# Altium PCB front_controller.PcbDoc
Units mil, origin at the board's own origin, x right, y up, seen from the top; angles counter-clockwise.
Board outline 2850 x 1885 mil, 2 copper layers (Top Layer, Bottom Layer); 25 components, 23 nets, 104 pads, 2 vias.
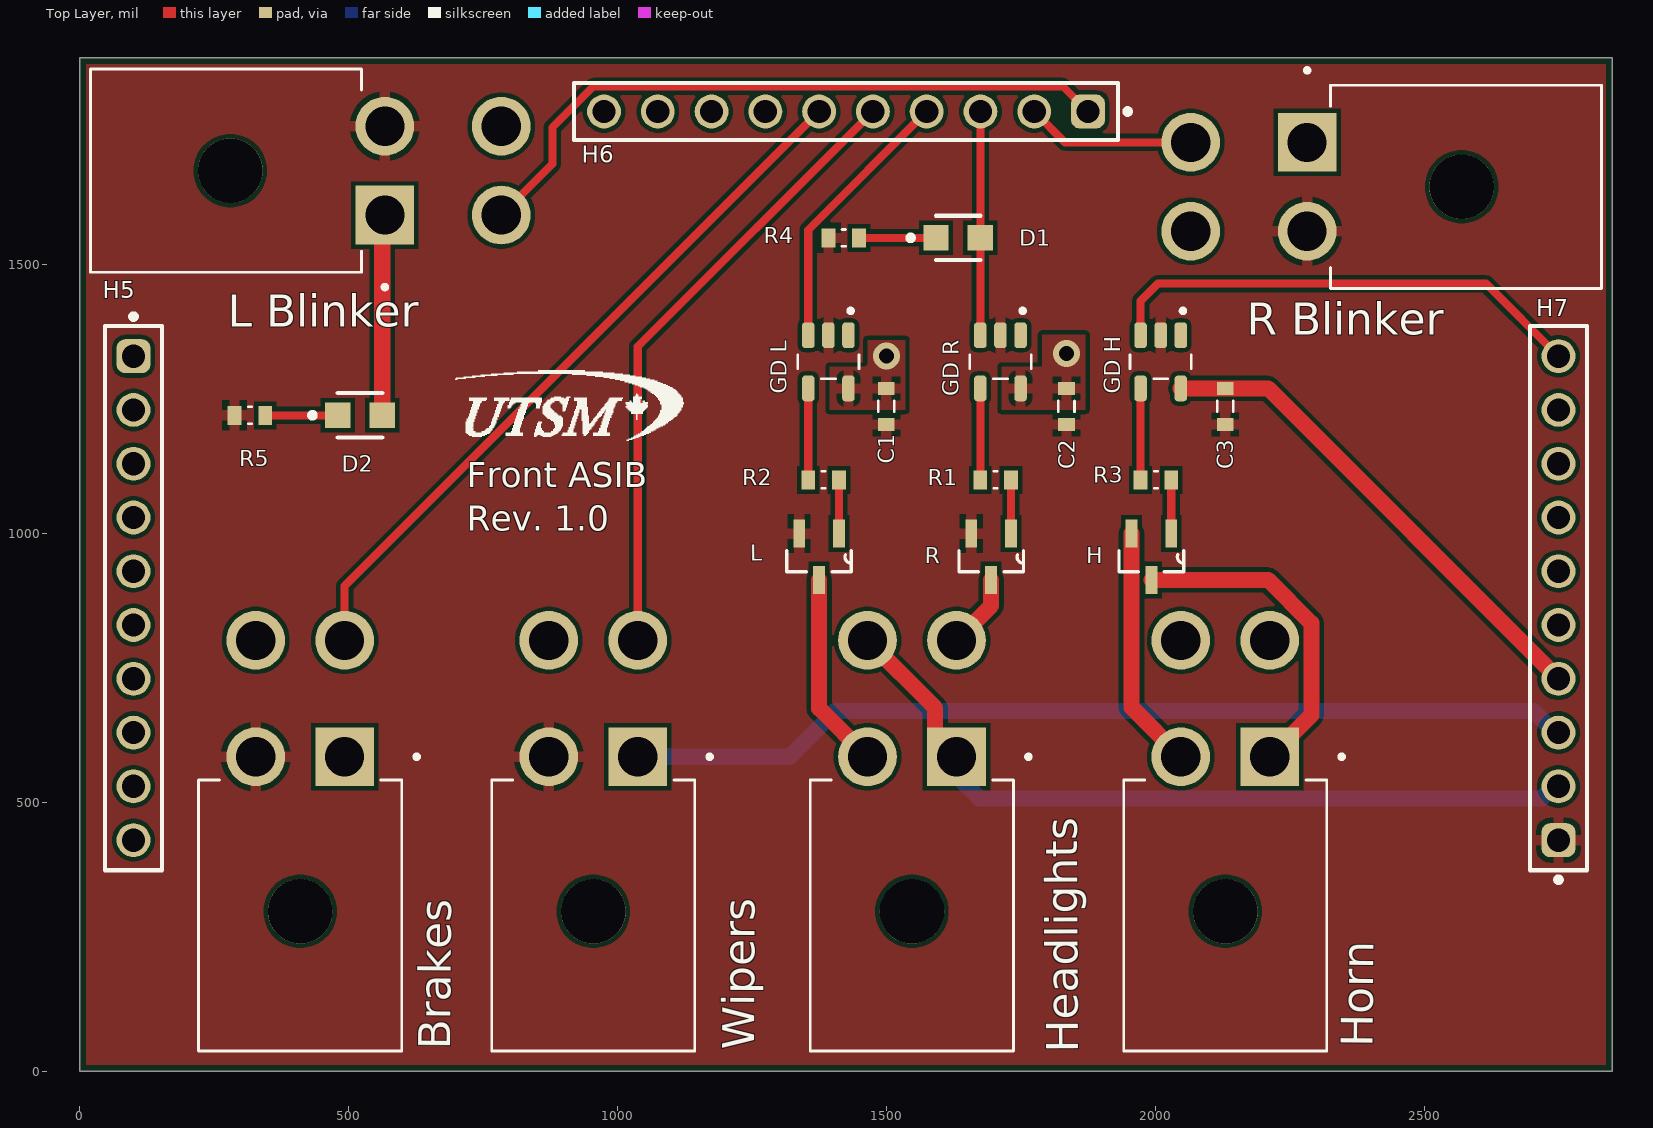
[diagram p0: Top Layer view]
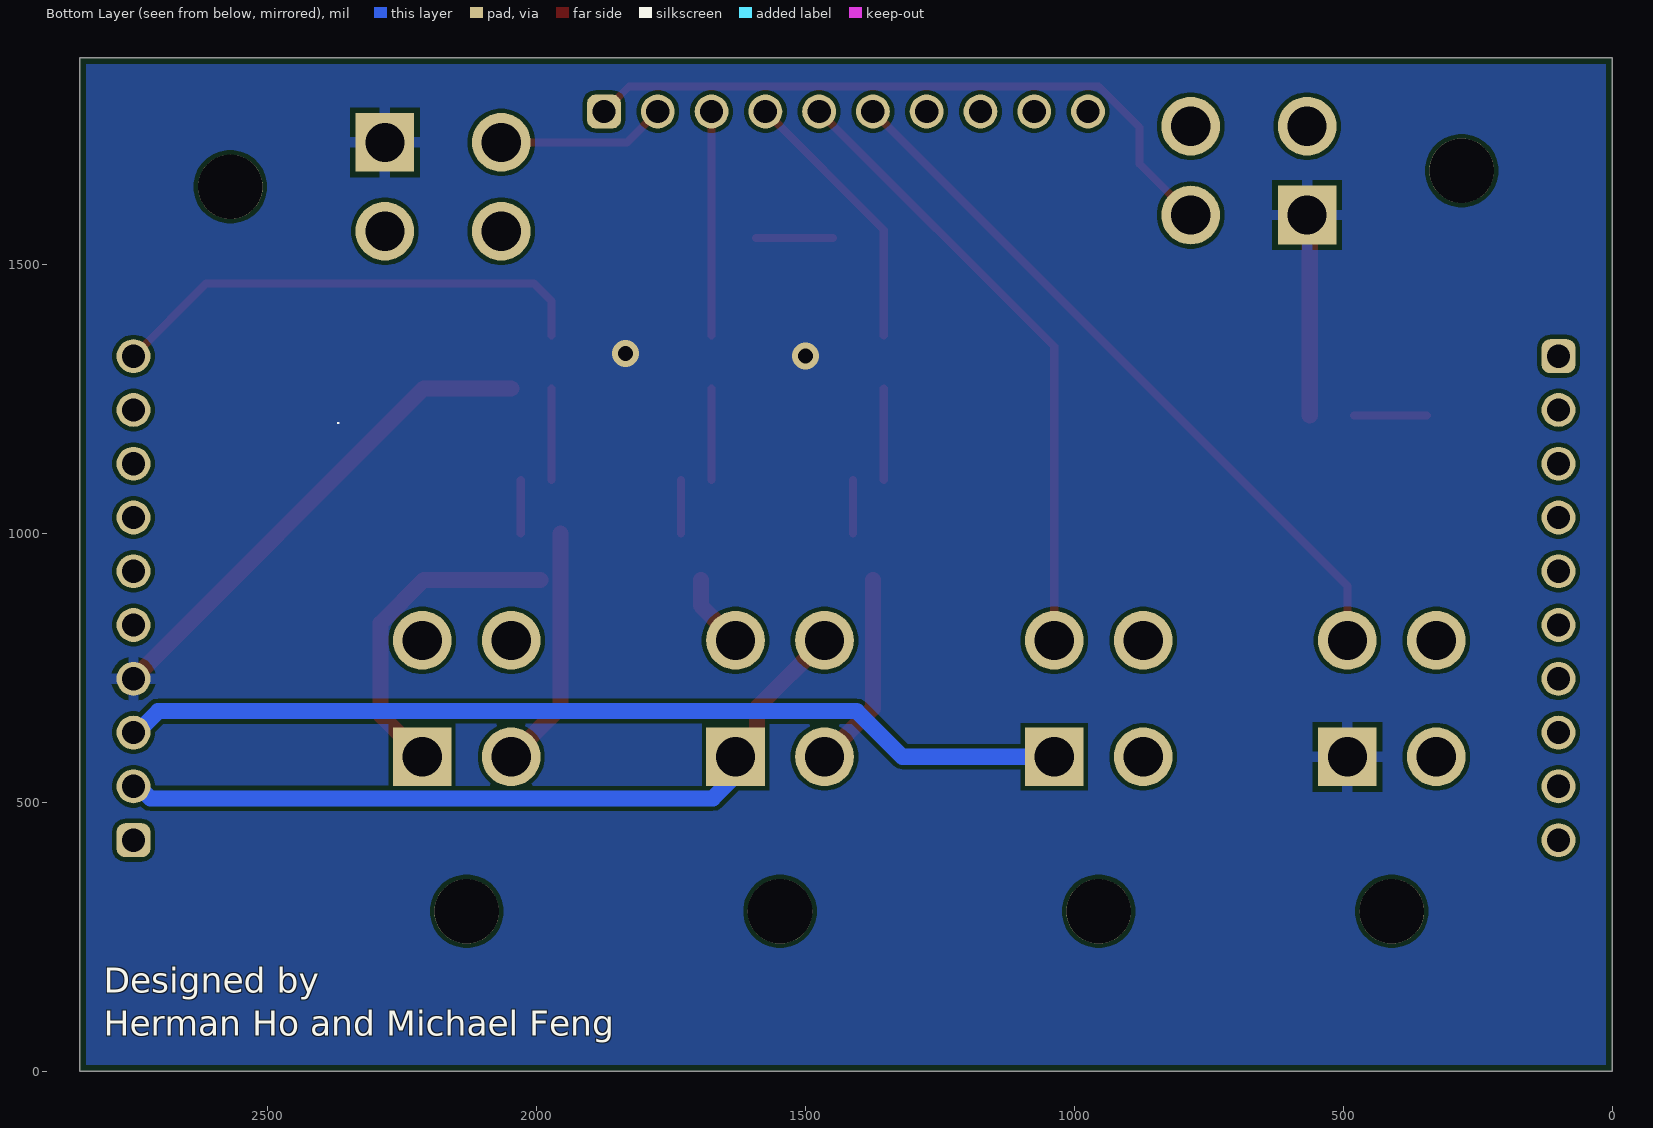
[diagram p1: Bottom Layer view, seen from below]

## Layer stack, top to bottom
Top Solder: solder mask 0.4, Solder Resist, Dk 3.5
Top Layer: signal copper 1.4
Dielectric 1: dielectric 12.6, FR-4, Dk 4.8
Bottom Layer: signal copper 1.4
Bottom Solder: solder mask 0.4, Solder Resist, Dk 3.5

## Board outline
0,0 2850,0 2850,1885 0,1885

## Design rules (kind name [scope] priority, off if disabled: settings)
BoardOutlineClearance [All] p1: gap=11.81 ignorepadtopadclearanceinfootprint=FALSE except(15.75: Arc-SplitBarrior Arc-SplitContinuation Track-SplitBarrior Track-SplitContinuation SMDPad-SplitBarrior SMDPad-SplitContinuation THPad-SplitBarrior THPad-SplitContinuation Via-SplitBarrior Via-SplitContinuation Fill-SplitBarrior Fill-SplitContinuation Poly-SplitBarrior Poly-SplitContinuation Region-SplitBarrior Region-SplitContinuation Text-SplitBarrior Text-SplitContinuation)
Clearance "Clearance Different Nets" [All] p1: gap=7.87 ignorepadtopadclearanceinfootprint=FALSE except(3.5: Arc-Arc Arc-Track Arc-SMDPad Track-Track Track-SMDPad; 5: SMDPad-SMDPad SMDPad-Via THPad-Via Via-Via; 10: Arc-Via Arc-Text Track-Via Track-Text SMDPad-Text THPad-Text Via-Text Fill-Text Poly-Text Region-Text Text-Text; 19.68: THPad-THPad Via-Hole)
Clearance "Clearance Same Nets" [All] p2: gap=7.87 ignorepadtopadclearanceinfootprint=FALSE except(3.5: Arc-Arc Arc-Track Arc-SMDPad Track-Track Track-SMDPad SMDPad-SMDPad; 5: SMDPad-Via THPad-Via; 10: Arc-Via Arc-Text Track-Via Track-Text SMDPad-Text THPad-Text Via-Via Via-Text Fill-Text Poly-Text Region-Text Text-Text)
Clearance "Clearance Bottom Layer" [OnLayer('Bottom Layer')] p3: gap=8 ignorepadtopadclearanceinfootprint=TRUE except(10: Arc-Text Track-Text SMDPad-Text THPad-Text Via-Text Fill-Text Poly-Text Region-Text Text-Text)
Clearance "Clearance Top Layer" [OnLayer('Top Layer')] p4: gap=8 ignorepadtopadclearanceinfootprint=TRUE except(10: Arc-Text Track-Text SMDPad-Text THPad-Text Via-Text Fill-Text Poly-Text Region-Text Text-Text)
HoleSize [All] p1: absolutevalues=TRUE maxlimit=248.03 minlimit=7.87 maxpercent=80.000 minpercent=20.000
MinimumAnnularRing [All] p1: minimumring=5.12
MinimumSolderMaskSliver [All] p1: minsoldermaskwidth=3.94
PolygonConnect PolygonConnect_1 [All] p1: thpad.connectstyle=Relief thpad.reliefconductorwidth=20 thpad.reliefentries=4 thpad.polygonreliefangle="90 Angle" thpad.airgapwidth=10 smdpad.connectstyle=Relief smdpad.reliefconductorwidth=20 smdpad.reliefentries=4 smdpad.polygonreliefangle="90 Angle" smdpad.airgapwidth=10 via.connectstyle=Direct via.reliefconductorwidth=20 via.reliefentries=4 via.polygonreliefangle="90 Angle" via.airgapwidth=10
RoutingCorners [All] p1: cornerstyle=Round minsetback=100 maxsetback=100
RoutingVias [All] p1: holewidth=19.68 width=39.37 viastyle="Through Hole" minholewidth=7.87 minwidth=13.78 maxholewidth=39.37 maxwidth=78.74
SilkToSilkClearance [All] p1: silktosilkclearance=3.94
SilkToSolderMaskClearance [IsPad] p1: minsilkscreentomaskgap=3.94 clearancetoexposedcopper=TRUE
SolderMaskExpansion [All] p1: expansion=4 istentingtop=FALSE
SupplyNets "Schematic Supply Nets_3" [InNet('+12')] p1: voltage=0.000
SupplyNets "Schematic Supply Nets_2" [InNet('+5')] p2: voltage=0.000
SupplyNets "Schematic Supply Nets_1" [InNet('+7')] p3: voltage=0.000
SupplyNets "Schematic Supply Nets" [InNet('GND')] p4: voltage=0.000
Width [All] p1: maxlimit=100 minlimit=3.5 preferedwidth=15
25 further rules are at their usual default settings.

## Components (designator, comment, footprint, x,y, rotation, side; value= is the part's Value field where it differs from the comment)
Brakes "0026013115" MOLEX_0026013115 492.68,585 r0 top
C1 "Cap" 0603c 1500,1236.5 r90 top value=0.1uF
C2 "Cap" 0603c 1835,1236.5 r90 top value=0.1uF
C3 "Cap" 0603c 2130.32,1236.5 r90 top value=0.1uF
D1 "LTST-C171GKT" FP-LTST-C171GKT-MFG 1633.66,1550 r0 top
D2 "LTST-C171GKT" FP-LTST-C171GKT-MFG 521.34,1220 r0 top
"GD H" "UCC27519DBVR" SOT95P280X145-5N 2010.24,1319.41 r270 top
"GD L" "UCC27519DBVR" SOT95P280X145-5N 1392.24,1319.41 r270 top
"GD R" "UCC27519DBVR" SOT95P280X145-5N 1712.24,1319.41 r270 top
H "IRLML6344TRPBF" SOT95P240X112-3N 1992.92,957 r270 top
H5 "61301011121" 61301011121 100,880 r270 top
H6 "61301011121" 61301011121 1425,1785 r180 top
H7 "61301011121" 61301011121 2750,880 r90 top
Headlights "0026013115" MOLEX_0026013115 1630.35,585 r0 top
Horn "0026013115" MOLEX_0026013115 2212.99,585 r0 top
L "IRLML6344TRPBF" SOT95P240X112-3N 1374.92,957 r270 top
"L Blinker" "0026013115" MOLEX_0026013115 567.4,1592.32 r270 top
R "IRLML6344TRPBF" SOT95P240X112-3N 1694.92,957 r270 top
R1 "10k" RES_ERJP03F1001V 1703.38,1100 r0 top
R2 "10k" RES_ERJP03F1001V 1383.38,1100 r0 top
R3 "10k" RES_ERJP03F1001V 2001.38,1100 r0 top
R4 "1K" RES_ERJP03F1001V 1420.78,1550 r0 top
R5 "1K" RES_ERJP03F1001V 316.46,1220 r0 top
"R Blinker" "0026013115" MOLEX_0026013115 2282.6,1727.68 r90 top
Wipers "0026013115" MOLEX_0026013115 1037.68,585 r0 top

## Footprints (in the part's own frame and the unit in brackets; to place one, negate y for a bottom-side part, rotate by r counter-clockwise, add the part's x,y. Pads: shape width x height; smd on the part's side, far side on the other; paste and mask are expansions set on the pad)
0603c [mil]
  rect 24x31 smd: 1(-33.5,0) 2(33.5,0)
  silkscreen extent -10,-15 10,15, body extent -31,-15 31,16, height 31
61301011121 [mm] "Pin Header, pitch 2.54 mm, THT, Vertical, single row, 10p"
  rrect50% 1.6x1.6 hole 1.1: 1(-11.43,0)
  round 1.6 hole 1.1: 2(-8.89,0) 3(-6.35,0) 4(-3.81,0) 5(-1.27,0) 6(1.27,0) 7(3.81,0) 8(6.35,0) 9(8.89,0) 10(11.43,0)
  silkscreen extent -13.42,-1.35 12.85,1.35, body extent -12.7,-1.27 12.7,1.27, height 8.57
FP-LTST-C171GKT-MFG [mm]
  rect 1.2x1.2 smd paste+0 mask+0: 1(-1.05,0) 2(1.05,0)
  silkscreen extent -2.37,-1.05 1.05,1.05, body extent -1.75,-0.77 1.75,0.77, height 0.25
MOLEX_0026013115 [mm]
  rect 2.775x2.775 hole 1.85: 1(0,0)
  round 2.775 hole 1.85: 2(-4.2,0) 3(0,5.5) 4(-4.2,5.5)
  round 3.05 hole 3.05 unplated: ""(-2.1,-7.3)
  silkscreen extent -6.9,-13.9 3.5,0.1
RES_ERJP03F1001V [mm]
  rect 0.65x0.9 smd: 1(-0.725,0) 2(0.725,0)
  silkscreen extent -0.08,-0.4 0.08,0.4
SOT95P240X112-3N [mil]
  rect 52x22 smd: 1(-43,37) 2(-43,-37) 3(43,0)
  silkscreen extent -11,-60 28,60
SOT95P280X145-5N [mm]
  rrect50% 1.21x0.59 smd: 1(-1.255,0.95) 2(-1.255,0) 3(-1.255,-0.95) 4(1.255,-0.95) 5(1.255,0.95)
  silkscreen extent -2.51,-1.45 0.8,1.45

## Part data
Brakes Headlights Horn "L Blinker" "R Blinker" Wipers: "Connector Header Through Hole, Right Angle 4 position 0.165 (4.20mm)", Package=None, Availability=Unavailable, DigiKey-Purchase-URL=https://snapeda.com/shop?store=DigiKey&id=2597941, MF=Molex, MP=0026013115, Price=None, SnapEDA_Link=https://www.snapeda.com/parts/0026013115/Molex/view-part/2597941/?ref=snap
C1 C2 C3: "SMD Capacitor", LatestRevisionDate=17-Jul-2002, LatestRevisionNote="Re-released for DXP Platform.", PackageDescription="Radial Cap, Thru-Hole; 2 Leads; 0.3 in Pin Spacing", PackageReference=RAD-0.3, Published=8-Jun-2000, Publisher="Altium Limited"
D1 D2: library part CMP-22017-000007-1, "LED GREEN CLEAR CHIP SMD", Case Code (Imperial)=0805, Case Code (Metric)=2012, Color=Green, Forward Current=30mA, Forward Voltage=2.1V, Lens Color=Colorless, Max Operating Temperature=85°C, Min Operating Temperature=-55°C, Package Quantity=1, Power Dissipation=100mW, Reverse Voltage=5V, Test Current=10mA, Case/Package=0805, Depth=1.25mm, Dominant Wavelength=569nm, Height=0.8mm, Illumination Color=Green, Lead Free="Lead Free", Length=2mm, Lens Style=Diffused, Lens Transparency=Clear, Luminous Intensity=12mcd, Mount="Surface Mount", Number of Elements=1, Number of LEDs=1, Number of Pins=2, Packaging="Tape and Reel", Power Rating=100mW, Radiation Hardening=No, Viewing Angle=130°, Wavelength=585nm, Width=1.25mm
"GD H" "GD L" "GD R": Package=None, Availability=Unavailable, MP=UCC27519DBVR, Price=None
H L R: "N-Channel 30V 5A _Ta_ 1.3W _Ta_ Surface Mount Micro3â„¢/SOT-23", Package="SOT-23 Infineon", Availability=Unavailable, MF="Infineon Technologies", MP=IRLML6344TRPBF, Price=None, SnapEDA_Link=https://www.snapeda.com/parts/IRLML6344TRPBF/Infineon%20Technologies/view-part/1786730/?ref=snap
H5 H6 H7: "WR-PHD Pin Header, THT, Vertical, pitch 2.54mm, 1 Row, 10P", Contact Resistance=20mOhm, Manufacturer="Wurth Elektronik", Operating Temperature Max=105°C, Operating Temperature Min=-40°C, Rated Current=3A, Withstanding Voltage=500V, Working Voltage=250V, Category="Board-to-Board Connectors", ComponentLink1Description="Website Link", ComponentLink1URL=https://www.we-online.com/redexpert/article/61301011121?ad, ComponentLink2Description="Datasheet Link", ComponentLink2URL=https://www.we-online.com/redexpert/spec/61301011121?ad, Gender="Pin Header", Manufacturer Part Number=61301011121, Match Code=WR-PHD, Mount="Through Hole", Number of Pins=10, Number of Rows=1, Orientation=Vertical, Packaging=Bag, Pitch=2.54mm
R1 R2 R3 R4 R5: library part ERJP03F1001V, Package=None, Availability=Unavailable, MP=ERJP03F1001V, Price=None

## Via types
v1: diameter 50, hole 28, Top Layer to Bottom Layer, 2 vias

## Nets (pads, with @x,y where several pads share a name; then routed paths per layer and width w, separated by ;. In a path a pad name is that pad's centre, name@x,y a point inside that pad or via, vN(x,y) a via of type N, cw(c..) or ccw(c..) an arc to the next point about the centre after c; other vN are vias at no path point)
+5: "GD H.5" "GD L.5" "GD R.5" "L Blinker.1" "R Blinker.1" Brakes.1 C1.2 C2.2 C3.2 D2.2 H7.4 | length 1300.3
  Top Layer w30: D2.2 562.68,1587.6 567.4,1592.32 ; 2047.64,1270 C3.2 2210,1270 H7.4
  other v1: 1500,1330 1835,1335
+7: H7.3 Wipers.1 | length 1764.1
  Bottom Layer w30: Wipers.1 1320.11,585 1405.11,670 2704.3,670 2744.3,630 H7.3
+12: H7.2 Headlights.1 Headlights.4 | length 1481.4
  Top Layer w30: Headlights.4 1590.73,675.81 1590.73,624.63 Headlights.1
  Bottom Layer w30: Headlights.1@1595.06,585 1672.56,507.5 2718.57,507.5 2741.07,530 H7.2
D0: "GD H.3" H7.10 | length 910.4
  Top Layer w15: 1972.83,1368.82 1972.83,1432.83 2005,1465 2615,1465 H7.10
D3: "L Blinker.3" H6.1 | length 1249.5
  Top Layer w15: 783.94,1592.32 878.78,1687.16 878.78,1755.06 955.59,1831.87 1828.13,1831.87 H6.1
D4: "R Blinker.3" H6.2 | length 314.8
  Top Layer w15: H6.2 1832.32,1727.68 2066.06,1727.68
D5: "GD R.3" D1.2 H6.3 | length 416.2
  Top Layer w15: 1674.83,1368.82 1674.83,1549.83 D1.2 H6.3
D6: "GD L.3" H6.4 | length 507.4
  Top Layer w15: 1354.83,1368.82 1354.83,1564.83 H6.4
D7: H6.5 Wipers.3 | length 1164.6
  Top Layer w15: Wipers.3 1037.68,1347.68 H6.5
D8: Brakes.3 H6.6 | length 1348.9
  Top Layer w15: Brakes.3 492.68,902.68 H6.6
Drain1: Headlights.2 L.3 | length 366.3
  Top Layer w30: L.3 1374.92,675.08 Headlights.2
Drain2: Headlights.3 R.3 | length 139.2
  Top Layer w30: Headlights.3 1694.92,866.1 R.3
Drain3: H.3 Horn.1 | length 611.6
  Top Layer w30: H.3 2210.13,914 2290.49,833.64 2290.49,662.5 Horn.1
GND: "GD H.2" "GD L.2" "GD R.2" "L Blinker.2" "R Blinker.2" Brakes.2 C1.1 C2.1 C3.1 H7.1 L.2 R4.1 R5.1 R.2 Wipers.2
NetD1_1: D1.1 R4.2 | length 143
  Top Layer w15: R4.2 D1.1
NetD2_1: D2.1 R5.2 | length 135
  Top Layer w15: R5.2 D2.1
"NetGD H_4": "GD H.4" R3.1 | length 170
  Top Layer w15: R3.1 1972.83,1270
"NetGD L_4": "GD L.4" R2.1 | length 170
  Top Layer w15: R2.1 1354.83,1270
"NetGD R_4": "GD R.4" R1.1 | length 170
  Top Layer w15: R1.1 1674.83,1270
NetH_1: H.1 R3.2 | length 100
  Top Layer w15: H.1 R3.2
NetL_1: L.1 R2.2 | length 100
  Top Layer w15: L.1 R2.2
NetR1_2: R1.2 R.1 | length 100
  Top Layer w15: R.1 R1.2
Source3: H.2 Horn.2 | length 453
  Top Layer w30: H.2 1955.92,676.72 Horn.2
pads on no net: "GD H.1" "GD L.1" "GD R.1" "L Blinker.4" "L Blinker." "R Blinker.4" "R Blinker." Brakes. Brakes.4 H5.1 H5.2 H5.3 H5.4 H5.5 H5.6 H5.7 H5.8 H5.9 H5.10 H6.7 H6.8 H6.9 H6.10 H7.5 H7.6 H7.7 H7.8 H7.9 Headlights. Horn. Horn.3 Horn.4 Wipers. Wipers.4

## Polygon pours and split planes (outlines as drawn)
+5 on Bottom Layer "+5_L02_P002" (solid, pour order 2): 0,0 2850,0 2850,1885 0,1885
GND on Top Layer "GND_L01_P001" (solid, pour order 1): 0,0 2850,0 2850,1885 0,1885
+5 on Top Layer "+5_L01_P004" (solid, pour order 4): 1465,1360 1535,1360 1535,1230 1395,1230 1395,1310 1460,1310 1465,1315
+5 on Top Layer "+5_L01_P003" (solid, pour order 3): 1870,1370 1870,1230 1715,1230 1715,1310 1790,1310 1790,1370

## Silkscreen, mask and mechanical layers (free items; w line width, h text height)
Top Overlay:
  drawing of 7 lines, arcs and shapes, not listed
  text "Front ASIB / Rev. 1.0" at 720,990 h80
Bottom Overlay:
  region: 2368.92,1207.47 2370.7,1207.47 2370.7,1203.92 2367.15,1203.92 2367.15,1207.47 2368.04,1207.47
  text "Designed by / Herman Ho and Michael Feng" at 2805,50 h80
Mechanical 1:
  the board outline again, w10